# Altium PCB Control Board.PcbDoc
Units mil, origin at the board's own origin, x right, y up, seen from the top; angles counter-clockwise.
Board outline 2165.35 x 472.44 mil, 2 copper layers (Top Layer, Bottom Layer); 30 components, 11 nets, 75 pads, 38 vias.
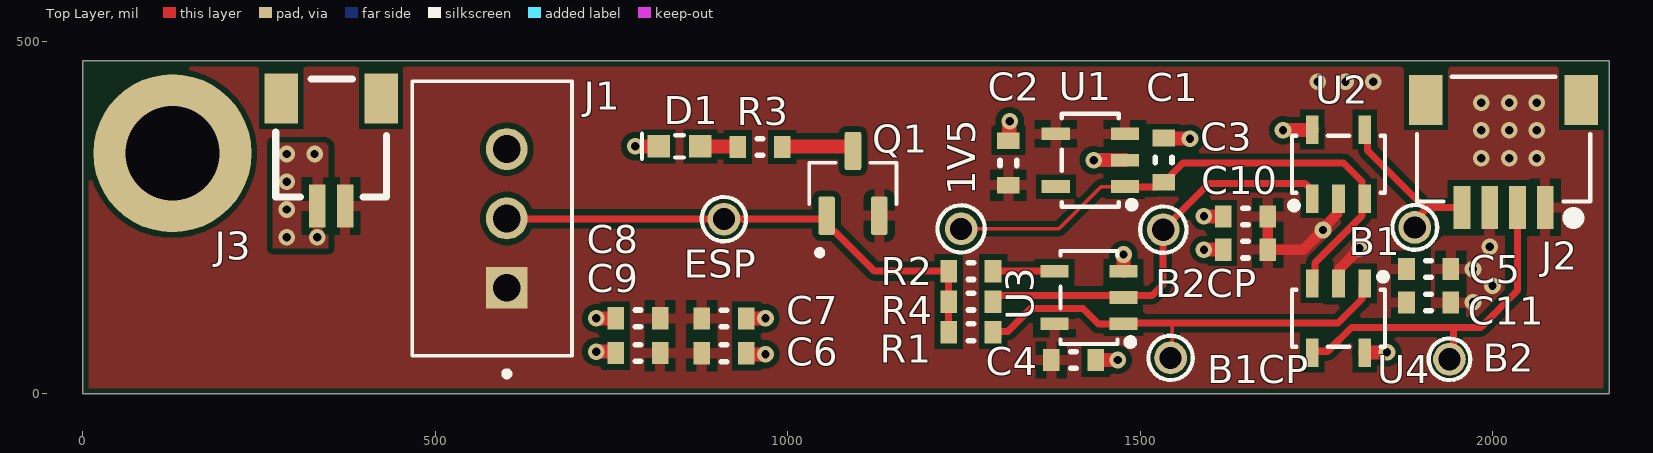
[diagram p0: Top Layer view]
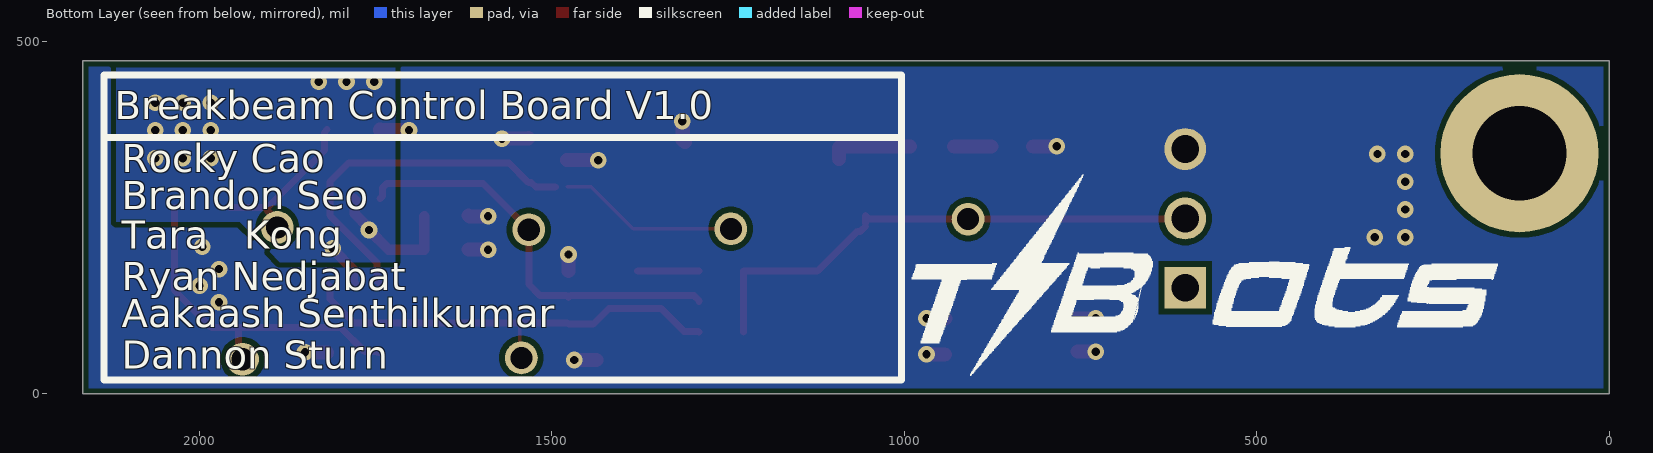
[diagram p1: Bottom Layer view, seen from below]

## Layer stack, top to bottom
Top Solder: solder mask 0.4, Solder Resist, Dk 3.5
Top Layer: signal copper 1.4
Dielectric 1: dielectric 12.6, FR-4, Dk 4.8
Bottom Layer: signal copper 1.4
Bottom Solder: solder mask 0.4, Solder Resist, Dk 3.5

## Board outline
0,0 2165.35,0 2165.35,472.44 0,472.44

## Design rules (kind name [scope] priority, off if disabled: settings)
BoardOutlineClearance [All] p1: gap=7.87 ignorepadtopadclearanceinfootprint=FALSE except(15.75: Arc-SplitBarrior Arc-SplitContinuation Track-SplitBarrior Track-SplitContinuation SMDPad-SplitBarrior SMDPad-SplitContinuation THPad-SplitBarrior THPad-SplitContinuation Via-SplitBarrior Via-SplitContinuation Fill-SplitBarrior Fill-SplitContinuation Poly-SplitBarrior Poly-SplitContinuation Region-SplitBarrior Region-SplitContinuation Text-SplitBarrior Text-SplitContinuation)
Clearance "Clearance Bottom Layer" [OnLayer('Bottom Layer')] p1: gap=8 ignorepadtopadclearanceinfootprint=TRUE except(10: Arc-Text Track-Text SMDPad-Text THPad-Text Via-Text Fill-Text Poly-Text Region-Text Text-Text)
Clearance "Clearance Top Layer" [OnLayer('Top Layer')] p2: gap=8 ignorepadtopadclearanceinfootprint=TRUE except(10: Arc-Text Track-Text SMDPad-Text THPad-Text Via-Text Fill-Text Poly-Text Region-Text Text-Text)
Clearance [All] p3: gap=7.87 ignorepadtopadclearanceinfootprint=FALSE except(3.5: Arc-Arc Arc-Track Arc-SMDPad Track-Track Track-SMDPad SMDPad-SMDPad; 5: Arc-Via Track-Via SMDPad-Via THPad-Via Via-Via; 10: Arc-Text Track-Text SMDPad-Text THPad-Text Via-Text Fill-Text Poly-Text Region-Text Text-Text)
HoleSize [All] p1: absolutevalues=TRUE maxlimit=248.03 minlimit=7.87 maxpercent=80.000 minpercent=20.000
MinimumAnnularRing [All] p1: minimumring=3
MinimumSolderMaskSliver [All] p1: minsoldermaskwidth=3.94
PolygonConnect [(InNet('3V3') AND InComponent('J1')) or (InNet('GND') AND InComponent('J1'))] p1: connectstyle=Direct reliefconductorwidth=10 reliefentries=4 polygonreliefangle="90 Angle" airgapwidth=10
PolygonConnect PolygonConnect_1 [All] p2: thpad.connectstyle=Relief thpad.reliefconductorwidth=15 thpad.reliefentries=4 thpad.polygonreliefangle="90 Angle" thpad.airgapwidth=10 smdpad.connectstyle=Relief smdpad.reliefconductorwidth=15 smdpad.reliefentries=4 smdpad.polygonreliefangle="90 Angle" smdpad.airgapwidth=10 via.connectstyle=Direct via.reliefconductorwidth=15 via.reliefentries=4 via.polygonreliefangle="90 Angle" via.airgapwidth=10
RoomDefinition "Control Board" [InComponentClass('Control Board')] p1: confinementstyle=ConfineIn formatcopy=TRUE lockcomponents=FALSE outline 208.66,4.92 2181.1,4.92 2181.1,469.49 208.66,469.49
RoutingCorners [All] p1: cornerstyle=Round minsetback=100 maxsetback=100
RoutingVias [All] p1: holewidth=19.68 width=39.37 viastyle="Through Hole" minholewidth=7.87 minwidth=17.72 maxholewidth=39.37 maxwidth=78.74
SilkToSilkClearance [All] p1: silktosilkclearance=3.94
SilkToSolderMaskClearance [IsPad] p1: minsilkscreentomaskgap=3.94 clearancetoexposedcopper=TRUE
SolderMaskExpansion [All] p1: expansion=4 istentingtop=FALSE
Width [All] p1: maxlimit=100 minlimit=3.5 preferedwidth=15
25 further rules are at their usual default settings.

## Components (designator, comment, footprint, x,y, rotation, side; value= is the part's Value field where it differs from the comment)
1V5 "Test Point (Via)" TP 1246.06,234.25 r90 top
B1 "Test Point (Via)" TP 1889.76,236.22 r0 top
B1CP "Test Point (Via)" TP 1543.31,51.18 r90 top
B2 "Test Point (Via)" TP 1938.98,49.21 r0 top
B2CP "Test Point (Via)" TP 1532.92,233.09 r90 top
C1 "0.10uF" 0603 1533.46,331.69 r270 top
C2 "0.10uF" 0603 1312.99,327.76 r90 top
C3 "0.10uF" 0603 1649.61,251.97 r0 top
C4 "0.10uF" 0603 1405.51,48.23 r180 top
C5 "0.10uF" 0603 1909.45,177.17 r180 top
C6 "10uF" 0603 909.45,57.7 r180 top
C7 "10uF" 0603 909.45,106.91 r180 top
C8 "10uF" 0603 787.4,107.28 r0 top
C9 "10uF" 0603 787.4,58.07 r0 top
C10 "1uF" 0603 1649.61,204.72 r180 top
C11 "1uF" 0603 1909.45,129.92 r0 top
D1 "0603 2V" "0603 - LED" 846.46,351.38 r180 top
ESP "Test Point (Via)" TP 909.45,248.03 r90 top
J1 "B3B-XH-A(LF)(SN)" JST_B3B-XH-A(LF)(SN) 601.38,249.02 r90 top
J2 "SM04B-SRSS-TB(LF)(SN)" CONN_SM04B_JST 2074.8,264.76 r180 top
J3 "SM02B-SRSS-TB" SM02B-SRSS-TB(LF)(SN) 352.24,344.36 r180 top
Q1 "FET P_CH SOT23_3" SOT-23A-3 1055.12,252.95 r90 top
R1 "DNP" 0603 1259.84,87.6 r0 top value=0
R2 "JUMPER" 0603 1259.84,174.21 r0 top value=0
R3 "100" 0603 960.63,350.39 r0 top
R4 "DNP" 0603 1259.84,130.91 r0 top value=0
U1 "REF2030QDDCRQ1" SOT-23-5_MC_MCH-L 1478.35,294.29 r180 top
U2 "MCP6541RT-E/OT" SOT-23-5_MC_MCH-L 1744.09,277 r90 top
U3 "SN74AHC1G08DBV3" SOT-23-5_MC_MCH-L 1476.38,99.41 r180 top
U4 "MCP6541RT-E/OT" SOT-23-5_MC_MCH-L 1818.9,156.5 r270 top

## Footprints (in the part's own frame and the unit in brackets; to place one, negate y for a bottom-side part, rotate by r counter-clockwise, add the part's x,y. Pads: shape width x height; smd on the part's side, far side on the other; paste and mask are expansions set on the pad)
0603 [mm] "Chip Resistor, 2-Leads, Body 1.60x0.80mm, IPC High Density"
  rect 0.6x0.8 smd mask+0.1: 1(-0.8,0) 2(0.8,0)
  silkscreen extent -0.1,-0.3 0.1,0.3, body extent -0.8,-0.4 0.8,0.4, height 0.6
"0603 - LED" [mm]
  rect 0.8x0.8 smd: 1(-0.75,0) 2(0.75,0)
  silkscreen extent -0.15,-0.45 1.35,0.45, body extent -0.8,-0.4 0.8,0.4, height 0.65
CONN_SM04B_JST [mm]
  rect 1.2x1.8 smd: 0(-1.3,-3.875) 0(4.3,-3.875)
  rect 0.6x1.55 smd: 1(0,0) 2(1,0) 3(2,0) 4(3,0)
  silkscreen extent -1.62,-4.7 4.62,0.38, body extent -1.5,-4.58 4.5,0.37, height 2.96
JST_B3B-XH-A(LF)(SN) [mm]
  rect 1.508x1.508 hole 1: 1(-2.5,0)
  round 1.508 hole 1: 2(0,0) 3(2.5,0)
  silkscreen extent -5.7,-2.35 4.95,3.4, body extent -4.96,-2.35 4.94,3.4, height 7
SM02B-SRSS-TB(LF)(SN) [mm]
  rect 0.6x1.55 smd: 1(-0.5,1.975) 2(0.5,1.975)
  rect 1.2x1.8 smd: 3(-1.8,-1.9) 4(1.8,-1.9)
  silkscreen extent -2,-2.6 2,1.65, body extent -2,-2.73 2,2.22, height 2.96
SOT-23-5_MC_MCH-L [mil]
  rect 40x18 smd: 1(0,0) 2(0,-37.4) 3(0,-74.8) 4(98,-74.8) 5(98,0)
  silkscreen extent -15,-103 90,31, body extent -14,-98 112,24, height 57
SOT-23A-3 [mm]
  rrect25% 1.38x0.6 smd: 1(0,0) 2(0,-1.9) 3(2.33,-0.95)
  silkscreen extent -1.43,-2.52 1.91,0.62, body extent -0.24,-2.45 2.59,0.55, height 1.2
TP [mm] "Test point (40mil Standard)"
  round 1.181 hole 0.8: 1(0,0)

## Part data
C1 C2 C3 C4 C5: library part "CAP 0.10uF 16V", "CAP CER 0.10UF 16V X5R 0603", Operating Temperature="-55°C ~ 85°C", Package=0603/0805, Rating=16V, Temperature Coefficient=X5R, Tolerance=10%, Part Number="CAP 0.10uF 16V"
C6 C7 C8 C9: library part "CAP 10uF 16V", "CAP CER 10UF 16V X5R 0603/0805", Operating Temperature="-55°C ~ 85°C", Package=0603/0805, Rating=16V, Temperature Coefficient=X5R, Tolerance=10%, Part Number="CAP 10uF 16V"
C10 C11: library part "CAP 1uF 50V", "Default Symbol for Capacitors", Rating=50V, Temperature Coefficient=X7R, Tolerance=10%, Part Number="CAP 1uF 50V"
D1: library part "LED GREEN SMD 0603", "LED Uni-Color Green 574nm 2-Pin Chip LED T/R", Current Rating=20mA, Manufacturer Part Number 1=LTST-C190KGKT, Supplier Part Number 1=160-1435-1-ND, Voltage Rating - DC=2V, Part Number="LED GREEN SMD 0603", Pin Count=2, Supplier 1=Digi-Key, Supplier URL 1=https://www.digikey.ca/en/products/detail/lite-on-inc/LTST-C190KGKT/386815?s=N4IgTCBcDaIIwDYAMBaOAWAzAVjSgcgCIgC6AvkA
J1: library part "CN HDR 3POS JST XH", "Connector Header Through Hole 3 position 0.098 (2.50mm)", Package=None, Supplier Part Number 1=455-2248-ND, Availability="In Stock", Check_prices=https://www.snapeda.com/parts/B3B-XH-A(LF)(SN)/JST%20Sales%20America%20Inc./view-part/231271/?ref=eda, Manufacturer Part Number 1=B3B-XH-A(LF)(SN), MF="JST Sales", MP=B3B-XH-A(LF)(SN), Part Number="CN HDR 3POS JST XH", Price=None, SnapEDA_Link=https://www.snapeda.com/parts/B3B-XH-A(LF)(SN)/JST%20Sales%20America%20Inc./view-part/231271/?ref=snap, Supplier 1=Digi-Key, Supplier URL 1=https://www.digikey.com/en/products/detail/jst-sales-america-inc/B3B-XH-A-LF-SN/1651046
J2: library part "CN HDR 4POS JST SH_SR", "CONN HEADER SMD R/A 4POS 1MM", Mfr_Name=JST, Supplier Part Number 1=455-1804-1-ND, Copyright="Copyright (C) 2023 Ultra Librarian. All rights reserved.", Digi-Key_Part_Number_1=455-1804-2-ND, Digi-Key_Part_Number_2=455-1804-1-ND, Digi-Key_Part_Number_3=455-1804-6-ND, Manufacturer_Part_Number=SM04B-SRSS-TB(LF)(SN), Part Number="CN HDR 4POS JST SH_SR", Pin Count=4, RefDes=RefDes, Supplier 1=Digi-Key, Supplier URL 1=https://www.digikey.ca/en/products/detail/jst-sales-america-inc/SM04B-SRSS-TB-LF-SN/926710, Type=DEV
J3: library part "CN HDR 2POS 90 JST SH", "No Description Available", Manufacturer Part Number 1=SM02B-SRSS-TB(LF)(SN), Mfr_Name=JST, Supplier Part Number 1=455-1802-2-ND, Copyright="Copyright (C) 2023 Ultra Librarian. All rights reserved.", Manufacturer_Part_Number=SM02B-SRSS-TB, Part Number="CN HDR 2POS 90 JST SH", Pin Count=2, RefDes=RefDes, Supplier 1=Digi-Key, Supplier URL 1=https://www.digikey.ca/en/products/detail/jst-sales-america-inc/SM02B-SRSS-TB-LF-SN/926708, Type=DEV
Q1: library part "MOSFET P-CH CJ2305", "P-Channel MOSFET General Purpose P-CH SOT23-3", Part Number="MOSFET P-CH CJ2305"
R1 R2 R4: library part "RES 0 JUMPER", "RES SMD 0 OHM JUMPER GENERIC 0603", Manufacturer Part Number 1=RK73Z1JTTD, Package=0805, Supplier Part Number 1=2019-RK73Z1JTTDCT-ND, Tolerance=N/A, Part Number="RES 0 JUMPER", Supplier 1=Digi-Key, Supplier URL 1=https://www.digikey.ca/en/products/detail/koa-speer-electronics-inc/RK73Z1JTTD/9845478
R3: library part "RES 100.0 1/8W - 5%", "Default Resistor Symbol", Manufacturer Part Number 1=RK73B1JRTTD101J, Manufacturer Part Number 2=RMCF0805JT100R, Package=0805, Power (Watts)=0.125W, Supplier Part Number 1=2019-RK73B1JRTTD101JCT-ND, Tolerance=5%, Part Number="RES 100.0 1/8W - 5%", Supplier 1=Digi-Key, Supplier 2=Digi-Key, Supplier Part Number 2=RMCF0805JT100RCT-ND, Supplier URL 1=https://www.digikey.ca/en/products/detail/koa-speer-electronics-inc/RK73B1JRTTD101J/12156165?s=N4IgTCBcDaIEoGkDsBmAQgRgFJwCq4BEMAGbAYVxAF0BfIA, Supplier URL 2=https://www.digikey.ca/en/products/detail/stackpole-electronics-inc/RMCF0805JT100R/1757756?s=N4IgTCBcDaIEoFkDCAxADADjQVgFIBUBGNNOJfEAXQF8g, Tolerance 2=5%
U1: "Series Voltage Reference IC Fixed 1.5V, 3V V ±0.05% 20 mA SOT-23-THIN", Manufacturer_Part_Number=SN74AHC1G08DBV3, Mfr_Name="Texas Instruments", Supplier Part Number 1=296-REF2030QDDCRQ1CT-ND, Copyright="Copyright (C) 2023 Ultra Librarian. All rights reserved.", Digi-Key_Part_Number_1=2156-SN74AHC1G08DBV3-ND, Digi-Key_Part_Number_2=296-SN74AHC1G08DBV3CT-ND, Digi-Key_Part_Number_3=296-SN74AHC1G08DBV3DKR-ND, Digi-Key_Part_Number_4=296-SN74AHC1G08DBV3TR-ND, Manufacturer Part Number 1=REF2030QDDCRQ1, Part Number=REF2030QDDCRQ1, RefDes=RefDes, Supplier 1=Digi-Key, Supplier URL 1=https://www.digikey.ca/en/products/detail/texas-instruments/REF2030QDDCRQ1/15926651?s=N4IgjCBcpg7LBOKoDGUBmBDANgZwKYA0IA9lANogCsVAHHSALrEAOALlCAMpsBOAlgDsA5iAC%2BxALQAmZCDSQ%2BAVyKkK1JmK1A, Type=DEV
U2 U4: library part "COMPARATOR MCP6541RT-EOT", "IC COMP 1.6V SNGL P-P SOT23-5", Supplier Part Number 1=MCP6541RT-E/OTCT-ND, Manufacturer Part Number 1=MCP6541RT-E/OT, Part Number="COMPARATOR MCP6541RT-EOT", Supplier 1=Digi-Key, Supplier URL 1=https://www.digikey.ca/en/products/detail/microchip-technology/MCP6541RT-E-OT/870211
U3: "IC GATE AND 1CH 2-INP SOT23-5", Mfr_Name="Texas Instruments", Supplier Part Number 1=296-SN74AHC1G08DBV3CT-ND, Copyright="Copyright (C) 2023 Ultra Librarian. All rights reserved.", Digi-Key_Part_Number_1=2156-SN74AHC1G08DBV3-ND, Digi-Key_Part_Number_2=296-SN74AHC1G08DBV3CT-ND, Digi-Key_Part_Number_3=296-SN74AHC1G08DBV3DKR-ND, Digi-Key_Part_Number_4=296-SN74AHC1G08DBV3TR-ND, Manufacturer Part Number 1=SN74AHC1G08DBV3, Manufacturer_Part_Number=SN74AHC1G08DBV3, Part Number=SN74AHC1G08DBV3, RefDes=RefDes, Supplier 1=Digi-Key, Supplier URL 1=https://www.digikey.ca/en/products/detail/texas-instruments/SN74AHC1G08DBV3/10434480, Type=DEV
1V5 B1 B1CP B2 B2CP ESP: Part Number="Test Point (Via)"

## Free pads (board coordinates)
  round 224.41 hole 133.86: 4(126.97,341.54)

## Via types
v1: diameter 23.62, hole 11.81, Top Layer to Bottom Layer, tented both sides, 38 vias

## Nets (pads, with @x,y where several pads share a name; then routed paths per layer and width w, separated by ;. In a path a pad name is that pad's centre, name@x,y a point inside that pad or via, vN(x,y) a via of type N, cw(c..) or ccw(c..) an arc to the next point about the centre after c; other vN are vias at no path point)
1V5: 1V5.1 C1.2 U1.1 U2.3 U4.3 | length 772.1
  Top Layer w5: 1V5.1 1384.84,234.25 1444.88,294.29 U1.1
  Top Layer w10: U1.1@1495.16,293.39 1522.72,293.39 C1.2@1529.53,300.2 ; C1.2 1560.9,327.63 1788.51,327.63 1814.9,301.24 1814.9,277 1814.9,252.89 1748.09,186.09 1748.09,160.5 U4.3
3V3: C2.1 C3.2 C4.2 C5.2 C6.2 C7.2 C8.2 C9.2 C10.1 C11.1 J1.1 J2.1 J3.1 Q1.2 U1.3 U1.4 U2.2 U3.5 U4.2 | length 253.1
  Top Layer w15: C3.2 C10.1 1731.64,204.72 v1(1759.52,232.6) 1759.52,234.94 1780,255.41 1780,275.5 U2.2 ; U4.2 1782.5,157.5 1782.5,177.19 1811.02,205.71 v1(1811.02,206.69)
  other v1: 1984.25,334.65 2023.62,334.65 2062.99,334.65 1984.25,374.02 2023.62,374.02 2062.99,374.02 1984.25,413.39 2023.62,413.39 2062.99,413.39 1751.97,442.91 1791.34,442.91 1830.71,442.91
BKBM1: B1.1 J2.4 U2.4 | length 232.5
  Top Layer w10: U2.4 1822.9,371 1822.9,345.22 1903.54,264.58 ; B1.1 1889.76,246.1 1903.54,259.88 1903.54,264.58 ; J2.4@1956.51,264.58 1903.54,264.58
BKBM2: B2.1 J2.2 U4.4 | length 492.5
  Top Layer w10: U4.4 1745.99,58.5 1748.09,60.6 1766.17,60.6 1800.06,94.49 1944.88,94.49 1983.27,94.49 2035.43,146.65 J2.2 ; B2.1 1944.88,55.12 1944.88,93.3
ESP: ESP.1 J1.2 Q1.1 R1.1 R2.1 R4.1 | length 751.3
  Top Layer w10: J1.2 601.87,248.52 908.96,248.52 ESP.1 1050.2,248.03 Q1.1 ; Q1.1@1055.12,237.6 1061.93,230.79 1066.26,230.79 1122.83,174.21 R2.1 R4.1 R1.1 ; Q1.1@1055.12,241.93 Q1.1@1055.12,250.91
GND: C1.1 C2.2 C3.1 C4.1 C5.1 C6.1 C7.1 C8.1 C9.1 C10.2 C11.2 D1.2 J1.3 J2.3 J3.2 U1.2 U2.5 U3.3 U4.5 | length 442.8
  Top Layer w10: C9.1@753.94,60.04 C9.1 ; C6.1 C6.1@942.54,56.1 ; C7.1 C7.1@941.32,107.28
  Top Layer w20: v1(728.35,60.04) C9.1@753.94,60.04 ; v1(728.35,107.28) C8.1 ; v1(783.46,351.38) D1.2 ; C7.1@941.32,107.28 v1(968.5,107.28) ; C6.1@942.54,56.1 v1(968.5,56.1) ; C2.2@1311.02,357.44 1312.83,359.25 C2.2 1314.27,360.53 1314.27,386.24 v1(1314.96,386.94) ; v1(1434.06,331.69) U1.2 ; C4.1 v1(1468.5,48.23) ; U3.3 v1(1476.38,197.83) ; C1.1 1533.96,362.7 1570.37,362.7 v1(1570.87,362.2) ; v1(1590.55,204.72) C10.2 ; v1(1590.55,251.97) 1617.13,251.97 C3.1@1618.11,252.95 ; v1(1702.76,374.02) 1703.25,374.51 1743.6,374.51 U2.5 ; U4.5 1819.18,58.78 1850.11,58.78 v1(1850.39,59.06)
  other v1: 1972.44,129.92 2000,153.54 1972.44,177.17 1996.06,208.66 289.24,222.32 332.55,222.32 289.24,261.69 289.24,301.06 289.24,340.43 328.61,340.43
NetB1CP_1: B1CP.1 R1.2 U3.1 U4.1 | length 660.5
  Top Layer w5: B1CP.1@1543.31,62.41 1543.31,67.91 B1CP.1@1545.28,65.94 ; B1CP.1@1545.28,51.18 B1CP.1@1545.28,65.94 ; 1545.28,100.6 B1CP.1@1545.28,65.94 ; B1CP.1@1556.1,55.12 1551.67,59.55 1546.06,65.16 B1CP.1@1545.28,65.94 ; 1560.04,98.63 1562.01,100.6
  Top Layer w10: R1.2 1292.61,88.87 1312.29,88.87 1344.83,121.41 1418.94,121.41 1440.94,99.41 U3.1 1477.57,100.6 1545.28,100.6 1562.01,100.6 1780.72,100.6 1814.9,134.78 1814.9,152.5 U4.1
NetB2CP_1: B2CP.1 R4.2 U2.1 U3.2 | length 586.9
  Top Layer w10: R4.2 1291.34,132.6 1298.15,139.41 1473.78,139.41 U3.2 1479.45,139.88 1517.17,139.88 1532.61,155.32 1532.61,233.4 1597.76,298.55 1734.24,298.55 1740.09,292.69 1740.09,281 U2.1
NetD1_1: D1.1 R3.1 | length 53.1
  Top Layer w20: D1.1 R3.1@929.13,351.38
NetQ1_3: Q1.3 R3.2 | length 137.6
  Top Layer w10: Q1.3@1085.71,351.38 1092.52,344.57 Q1.3@1092.52,333.66
  Top Layer w20: R3.2@992.13,351.38 1090.71,351.38 1092.52,349.57 Q1.3@1092.52,333.66
NetR2_2: R2.2 U3.4 | length 87
  Top Layer w10: R2.2 U3.4
pads on no net: J2.0 J3.3 J3.4 U1.5

## Polygon pours and split planes (outlines as drawn)
3V3 on Bottom Layer "NONET_L-01_P-001" (solid, pour order 94): 1885.83,187.01 1942.91,244.09 2118.11,244.09 2118.11,462.6 1722.44,462.6 1722.44,187.01
GND on Bottom Layer "GND_L01_P000" (solid, pour order 99): 0,472.44 2165.35,472.44 2165.35,0 0,0
GND on Top Layer "GND_L01_P092" (solid, pour order 92): 269.56,324.99 269.56,356.17 344.36,356.17 348.3,352.24 348.3,206.57 269.56,206.57
3V3 on Top Layer "3V3_L01_P097" (solid, pour order 97): 0,472.44 2165.35,472.44 2165.35,-3.94 7.87,-3.94 0,3.94
GND on Top Layer "GND_L01_P098" (solid, pour order 98): 1978.35,224.25 1978.19,224.41 1929.13,224.41 1912.89,208.17 1912.89,110.73 1980.32,109.25 2017.72,146.65 2017.72,304.13 1978.35,304.13

## Silkscreen, mask and mechanical layers (free items; w line width, h text height)
Top Overlay:
  circle w6: c1889.76,236.22 r31.74
  circle w6: c1938.98,49.21 r29.59
  circle w6: c1543.31,51.18 r31.5
  circle w6: c1532.92,233.09 r32.93
  circle w6: c1246.06,234.25 r33.52
  circle w6: c909.45,248.03 r31.5
Bottom Overlay:
  drawing of 14 lines, arcs and shapes, not listed
  text "Breakbeam Control Board V1.0" at 2119.98,389.86 h40
  text "Rocky Cao" at 2110.14,314.6 h40
  text "Brandon Seo" at 2110.14,261.91 h40
  text "Tara   Kong" at 2110.14,206.34 h40
  text "Ryan Nedjabat" at 2110.14,147.28 h40
  text "Aakaash Senthilkumar" at 2110.14,94.58 h40
  text "Dannon Sturn" at 2110.14,35.53 h40
Board Outline:
  the board outline again, w10

## Dimensions
0,0 to 0,472.44 on Dimensions
0,0 to 2165.35,0 on Dimensions